# EAGLE board ALPS_RSA0N11M9A04_Faderboard (EAGLE 6.2)
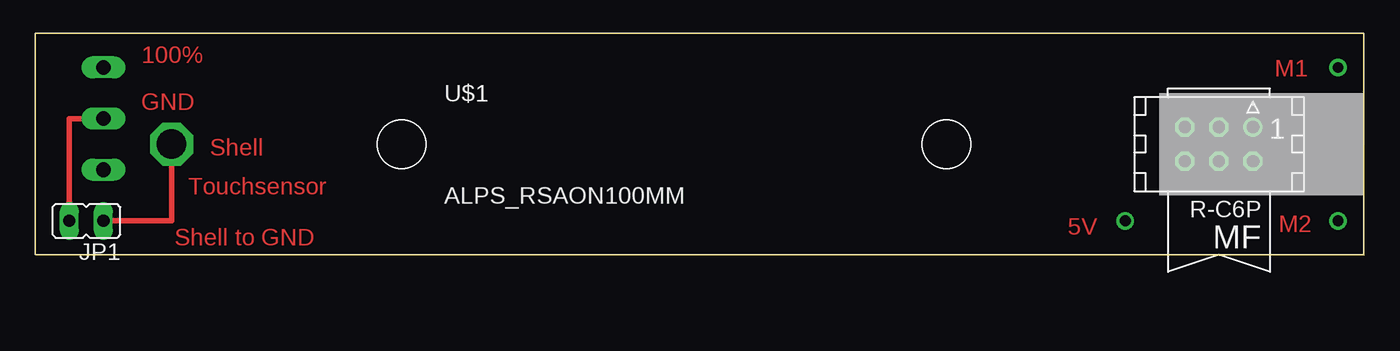
[diagram p0: board, top side]
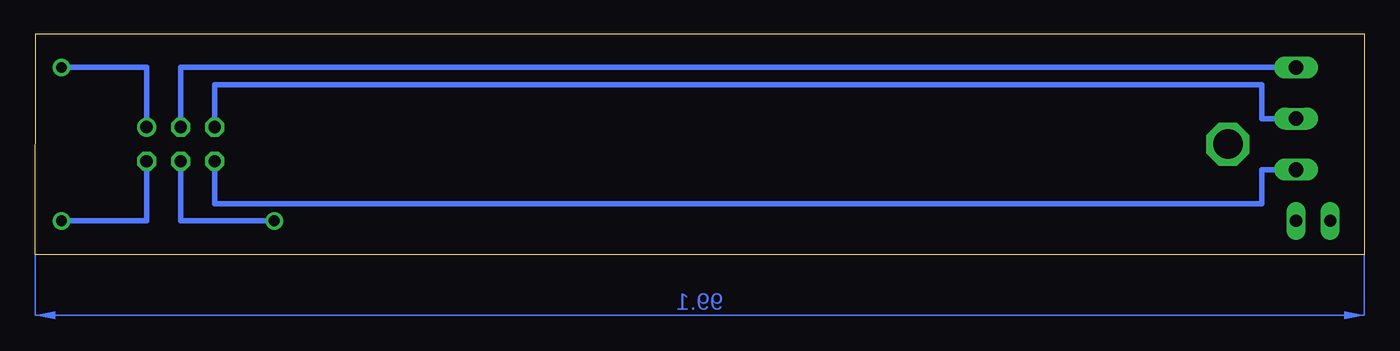
[diagram p1: board, bottom side, seen from below]

Size 99.1 x 16.5 mm. Coordinates in mm from the lower left corner, seen from the top.
Outline: 0,0 99.1,0 99.07,16.5 0,16.5 0,0
Copper layers (1*16): Top 0.035mm / dielectric 1.5mm / Bottom 0.035mm
Design rules: minimum track width 10mil, minimum drill 24mil, track to track 8mil, track to pad 8mil, pad to pad 8mil, via to via 8mil, smd to smd 8mil, copper to edge 40mil, drill to drill 8mil, minimum pad ring 10mil, minimum via ring 8mil, stop-mask expansion 4mil, vias tented up to drill 0mil, thermal gap 10mil

## Footprints (pad centres in the part's own frame; a part is rotated, then mirrored left to right if it is on the bottom)
JP1 = drill 0.914 long: 1 0,-1.27; 2 0,1.27
CON06 = drill 0.914: 1 -2.54,-1.27 | drill 0.914 octagon: 2 -2.54,1.27; 3 0,-1.27; 4 0,1.27; 5 2.54,-1.27; 6 2.54,1.27
ALPS_RAS0N_MOTOR-FADER = drill 0.8: 0% 76.2,0; M+ 92.075,0; M- 92.075,11.43 | drill 1.1 long: 100% 0,7.62; TOUCHSENSOR 0,3.81; WIPER 0,11.43 | drill 2.2 octagon: SHELL 5.08,5.715

## Placement (x,y rotation side)
JP1  [JP1]  3.81,2.54 90 top
MF  J01  [CON06]  88.27,8.26 180 top
U$1  ALPS_RSAON100MM  [ALPS_RAS0N_MOTOR-FADER]  5.08,2.54 0 top

## Library data of the parts
JP1 = jumper
MF = con-harting; OC_FARNELL: unknown; OC_NEWARK: unknown
U$1 = ALPS_RASON100

## Nets
N$1: MF.1 U$1.M-
N$2: MF.2 U$1.M+
N$3: MF.3 U$1.WIPER
N$4: MF.4 U$1.0%
N$5: JP1.2 MF.5 U$1.100%
N$6: MF.6 U$1.TOUCHSENSOR
N$7: JP1.1 U$1.SHELL

## Tracks (layer width: path | path; a pad name or v marks a point on that pad's centre or on a via)
N$1
  Bottom 0.406: U$1.M- 90.81,13.97 MF.1
N$2
  Bottom 0.406: U$1.M+ 90.81,2.54 MF.2
N$3
  Bottom 0.406: U$1.WIPER 88.27,13.97 MF.3
N$4
  Bottom 0.406: U$1.0% 88.27,2.54 MF.4
N$5
  Top 0.406: JP1.2 2.54,10.16 U$1.100%
  Bottom 0.406: U$1.100% 7.62,10.16 7.62,12.7 85.72,12.7 MF.5
N$6
  Bottom 0.406: U$1.TOUCHSENSOR 7.62,6.35 7.62,3.81 85.72,3.81 MF.6
N$7
  Top 0.406: JP1.1 10.16,2.54 U$1.SHELL
(copper drawn outside any net)
  shapes: Bottom area x1

## Text on the board
Top: 100% | M1 | GND | Shell | Touchsensor | 5V | M2 | Shell to GND